# Altium PCB PCB1.PcbDoc
Units mil, origin at the board's own origin, x right, y up, seen from the top; angles counter-clockwise.
Board outline 6000 x 4000 mil, 2 copper layers (Top Layer, Bottom Layer); 30 components, 18 nets, 101 pads, 0 vias.
Unrouted connection lines stored in the file: 64.
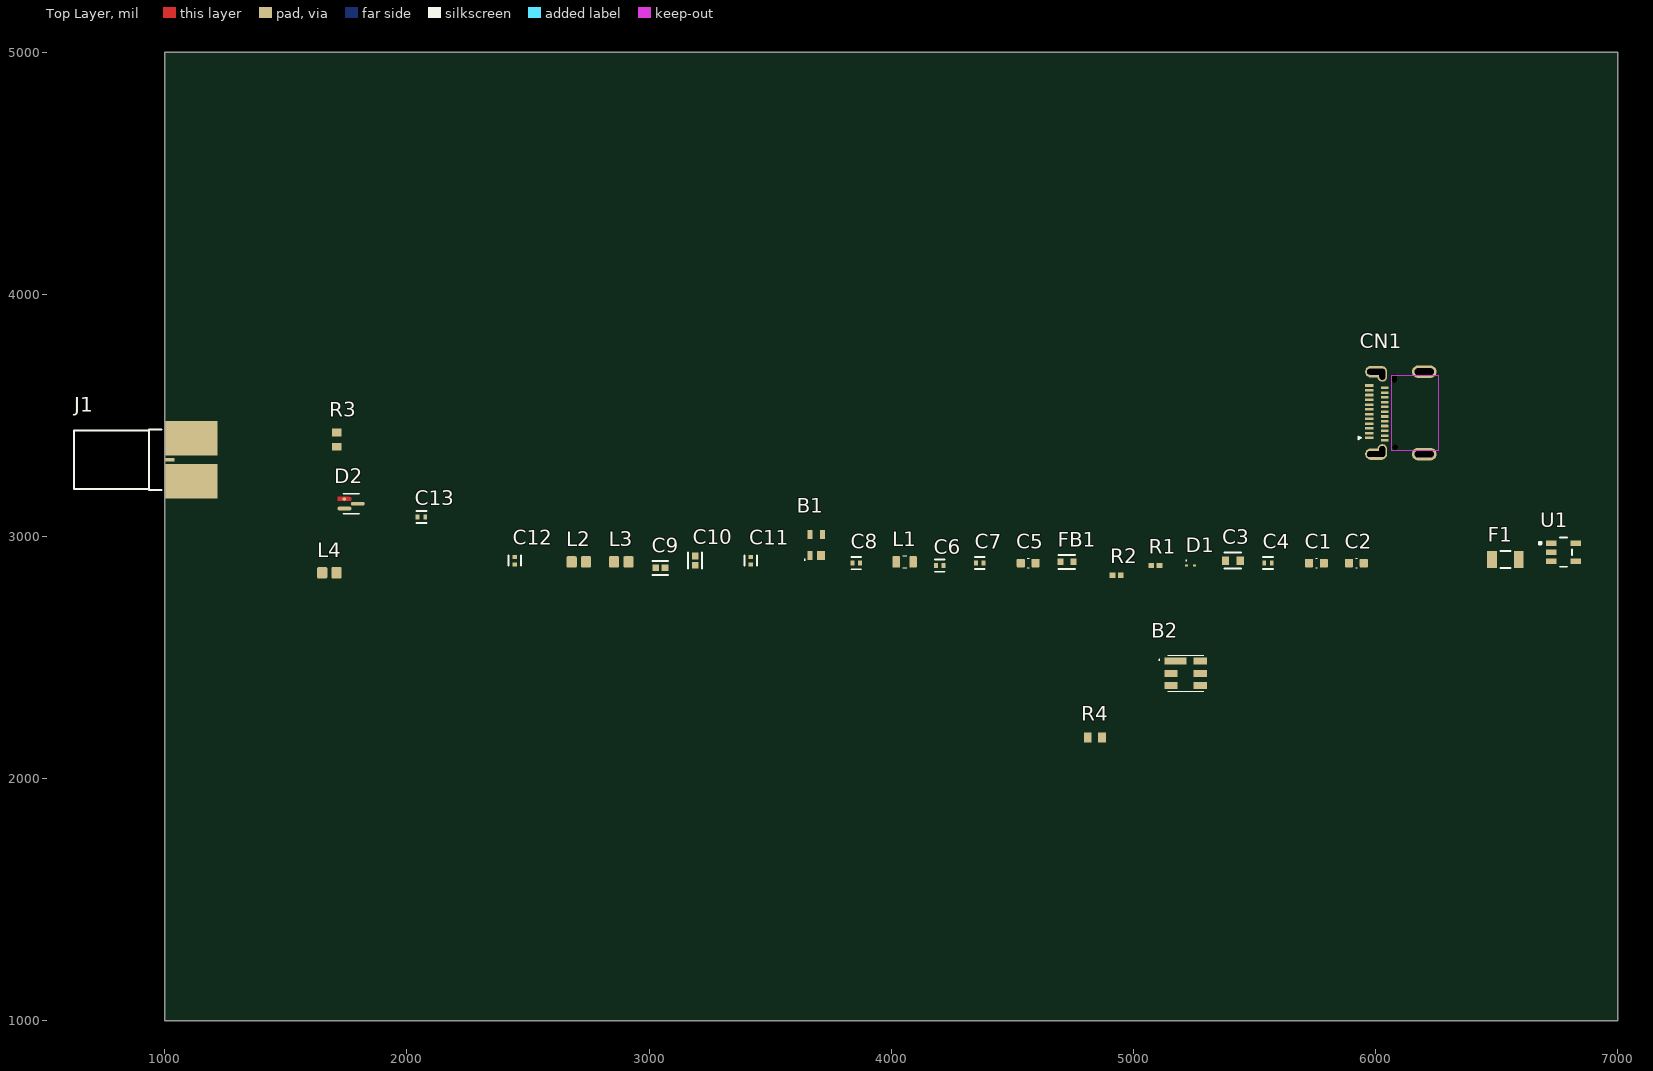
[diagram p0: Top Layer view]
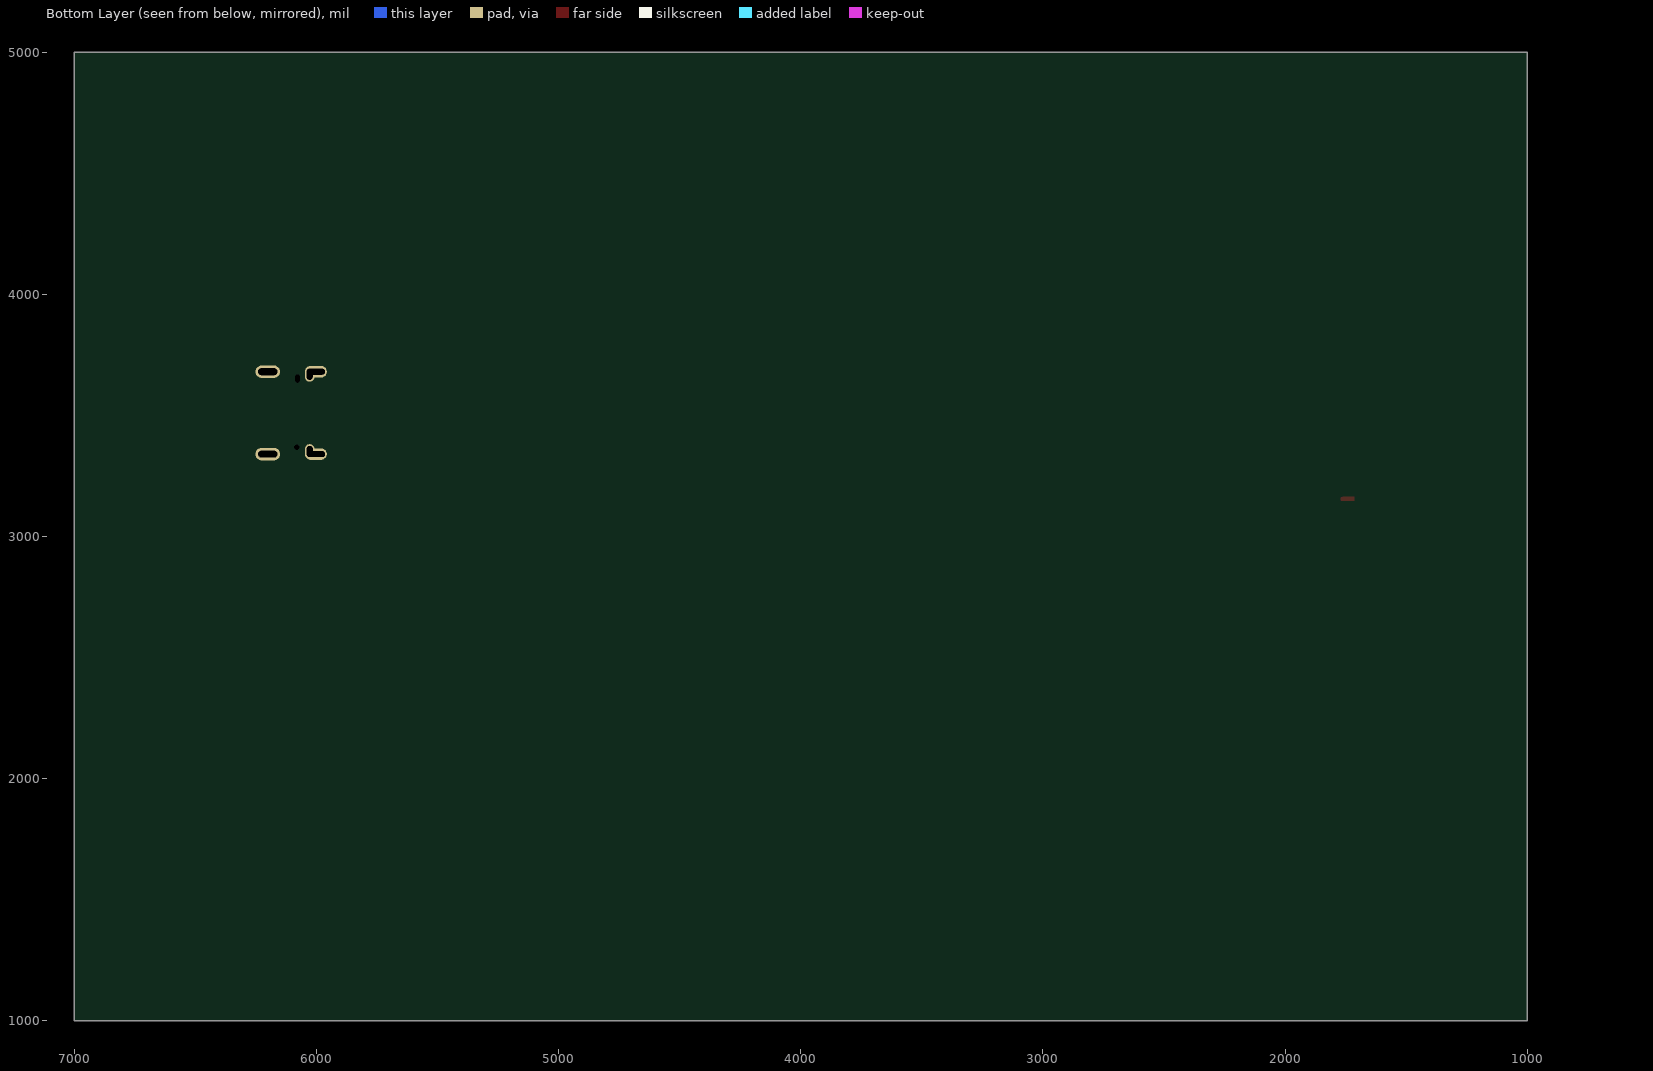
[diagram p1: Bottom Layer view, seen from below]

## Layer stack, top to bottom
Top Solder: solder mask 0.4, Solder Resist, Dk 3.5
Top Layer: signal copper 1.4
Dielectric 1: dielectric 12.6, FR-4, Dk 4.8
Bottom Layer: signal copper 1.4
Bottom Solder: solder mask 0.4, Solder Resist, Dk 3.5

## Board outline
1000,1000 7000,1000 7000,5000 1000,5000

## Design rules (kind name [scope] priority, off if disabled: settings)
Clearance [All] p1: gap=10 ignorepadtopadclearanceinfootprint=FALSE
PolygonConnect [All] p1: connectstyle=Relief reliefconductorwidth=10 reliefentries=4 polygonreliefangle="90 Angle" airgapwidth=10
RoutingVias [All] p1: holewidth=28 width=50 viastyle="Through Hole" minholewidth=28 minwidth=50 maxholewidth=28 maxwidth=50
SolderMaskExpansion [All] p1: expansion=0 istentingtop=FALSE
SupplyNets "Schematic Supply Nets_2" [InNet('+5')] p1: voltage=0.000
SupplyNets "Schematic Supply Nets_1" [InNet('+3.3V')] p2: voltage=0.000
SupplyNets "Schematic Supply Nets" [InNet('GND')] p3: voltage=0.000
Width [All] p1: maxlimit=10 minlimit=10 preferedwidth=10
30 further rules are at their usual default settings.

## Classes and differential pairs
component class 01_POWER: C1 C2 C3 C4 CN1 D1 F1 R1 R2 U1
component class 02_RF_FRONT_END: B1 B2 C5 C6 C7 C8 C9 C10 C11 C12 C13 D2 FB1 J1 L1 L2 L3 L4 R3 R4

## Components (designator, comment, footprint, x,y, rotation, side; value= is the part's Value field where it differs from the comment)
B1 "PSA4-5043+" PSA45043 3690,2965 r0 top
B2 "SF2321D" SF2321D 5215,2435 r0 top
C1 "GRM188R61A105KA61D" RESC1608X100N 5755,2890 r0 top value=1µF
C2 "GRM188R61A105KA61D" RESC1608X100N 5920,2890 r0 top value=1µF
C3 "GRM188R61A106KE69D" FP-GRM18-0_15-MFG 5410,2900 r0 top value=10µF
C4 "GRM155R71C104KA88D" FP-GRM15-MFG 5555,2890 r0 top value=100nF
C5 "GRM188R61A105KA61D" RESC1608X100N 4565,2890 r0 top value=1µF
C6 "GCM1555C1H101JA16J" FP-GCM155-0_05-MFG 4200,2880 r0 top value=100pF
C7 "GRM155R71C104KA88D" FP-GRM15-MFG 4365,2890 r0 top value=100nF
C8 "GRM1555C1H102JA01D" FP-GRM155-0_05-MFG 3855,2890 r0 top value=1nF
C9 "GJM1555C1H3R0CB01D" FP-GJM155-0_05-IPC_A 3046.16,2870 r0 top value=3pF
C10 "GJM1555C1H3R0CB01D" FP-GJM155-0_05-IPC_A 3190,2900 r90 top value=3pF
C11 "GCM1555C1H101JA16J" FP-GCM155-0_05-MFG 3420,2900 r90 top value=100pF
C12 "GCM1555C1H101JA16J" FP-GCM155-0_05-MFG 2445,2900 r90 top value=100pF
C13 "GJM1555C1H4R7CB01D" FP-GJM155-0_05-MFG 2060,3080 r0 top value=4.7pF
CN1 "DX07S024JJ3R1300" JAE-DX07S024JJ3_V 6080,3510 r90 top
D1 "ESD9B5.0ST5G" ONSC-SOD-923-2-514AB-01_V 5235,2880 r0 top
D2 "RCLAMP0502BATCT" FP-SC75-IPC_A 1770,3135 r0 top
F1 "1206L050YR" FP-1206L050YR-MFG 6535,2905 r0 top
FB1 "BLM18AG102SN1D" FP-BLM18-0_15-t0_8-MFG 4725,2895 r0 top
J1 "60312202111561" 60312202111561 1110,3316.02 r270 top
L1 "Coilcraft 0603CS-68NX" INDC1811X102N#1 4055,2895 r0 top value=68nH
L2 "0603CS5N6XJRW" INDC1811X100N 2710,2895 r0 top value=5.6nH
L3 "0603CS5N6XJRW" INDC1811X102N#2 2885,2895 r0 top value=5.6nH
L4 "0603CS-3N9XJRW" INDC1811X100N 1680,2850 r0 top value=3.9nH
R1 "RC0402FR-075K1L" RESC1005X40X25NL05T10 5090,2880 r0 top value=5.1k
R2 "RC0402FR-075K1L" RESC1005X40X25NL05T10 4930,2840 r0 top value=5.1k
R3 "Resistor 0R +/- 5% 0603 100 mW" RESC1608X55X25ML10T15 1710,3399.53 r90 top value=0
R4 "Resistor 0R +/- 5% 0603 100 mW" RESC1608X55X25ML10T15 4840.47,2170 r0 top value=0
U1 "TPS7A2033PDBVR" FP-DBV0005A-MFG 6775,2935 r0 top

## Footprints (in the part's own frame and the unit in brackets; to place one, negate y for a bottom-side part, rotate by r counter-clockwise, add the part's x,y. Pads: shape width x height; smd on the part's side, far side on the other; paste and mask are expansions set on the pad)
60312202111561 [mm] "SMA Edgecard Mount Jack"
  rect 0.35x1 smd: 1(0,-2.27)
  rect 3.61x5.54 smd: 2(-2.26,0) 3(2.26,0)
  silkscreen extent -3.17,-12.3 3.18,-3.1, body extent -3.18,-12.3 3.18,1.78, height 3.29
FP-1206L050YR-MFG [mm]
  rect 1x1.8 smd paste+0 mask+0: 1(-1.4,0) 2(1.4,0)
  silkscreen extent -0.53,-0.9 0.53,0.9, body extent -2,-1 2,1, height 0.25
FP-BLM18-0_15-t0_8-MFG [mm]
  rect 0.65x0.7 smd paste+0 mask+0: 1(-0.675,0) 2(0.675,0)
  silkscreen extent -0.87,-0.72 0.87,0.72, body extent -1.1,-0.58 1.1,0.58, height 0.25
FP-DBV0005A-MFG [mm]
  rrect17% 1.1x0.6 smd paste+0 mask+0: 1(-1.3,0.95) 2(-1.3,0) 3(-1.3,-0.95) 4(1.3,-0.95) 5(1.3,0.95)
  silkscreen extent -2.57,-1.53 0.87,1.53, body extent -1.95,-1.78 1.95,1.78, height 0.25
FP-GCM155-0_05-MFG [mm]
  rect 0.4x0.5 smd paste+0 mask+0: 1(-0.4,0) 2(0.4,0)
  silkscreen extent -0.53,-0.65 0.53,0.65, body extent -0.7,-0.38 0.7,0.38, height 0.25
FP-GJM155-0_05-IPC_A [mil]
  rect 28.16x26.48 smd paste+0 mask+0: 1(-18.84,0) 2(18.84,0)
  silkscreen extent -33,-29 33,29, body extent -41,-21 41,21, height 10
FP-GJM155-0_05-MFG [mm]
  rect 0.4x0.5 smd paste+0 mask+0: 1(-0.4,0) 2(0.4,0)
  silkscreen extent -0.53,-0.63 0.53,0.63, body extent -0.7,-0.38 0.7,0.38, height 0.25
FP-GRM15-MFG [mm]
  rect 0.4x0.5 smd paste+0 mask+0: 1(-0.4,0) 2(0.4,0)
  silkscreen extent -0.53,-0.63 0.53,0.63, body extent -0.7,-0.38 0.7,0.38, height 0.25
FP-GRM18-0_15-MFG [mm]
  rect 0.75x0.9 smd paste+0 mask+0: 1(-0.775,0) 2(0.775,0)
  silkscreen extent -0.88,-0.83 0.87,0.85, body extent -1.25,-0.58 1.25,0.58, height 0.25
FP-GRM155-0_05-MFG [mm]
  rect 0.4x0.5 smd paste+0 mask+0: 1(-0.4,0) 2(0.4,0)
  silkscreen extent -0.5,-0.65 0.5,0.65, body extent -0.7,-0.38 0.7,0.38, height 0.25
FP-SC75-IPC_A [mm]
  round 0.374 smd paste+0 mask+0: 1(-0.722,0.5)
  rrect100% 1.457x0.416 smd paste+0 mask+0: 2(-0.701,-0.5) 3(0.701,0)
  Top Layer region: -1.429,0.708 -0.18,0.708 -0.1,0.692 -0.033,0.647 0.012,0.58 0.028,0.5 0.028,0.5 0.012,0.42 -0.033,0.353 -0.1,0.308 -0.18,0.292 -0.18,0.292 -1.429,0.292
  silkscreen extent -0.8,-1.05 0.8,1.05, body extent -1.93,-1.3 1.93,1.3, height 0.25
INDC1811X100N [mm] "Chip Inductor, 2-Leads, Body 1.75x1.06mm, IPC Medium Density"
  rrect25% 1.065x1.19 smd: 1(-0.753,0) 2(0.753,0)
  body extent -0.87,-0.53 0.87,0.53, height 1
INDC1811X102N#1 [mm] "Chip Inductor, 2-Leads, Body 1.75x1.06mm, IPC Medium Density"
  rrect25% 0.8x1.19 smd: 1(-0.885,0) 2(0.885,0)
  silkscreen extent -0.22,-0.62 0.22,0.62, body extent -0.87,-0.53 0.87,0.53, height 1.02
INDC1811X102N#2 [mm] "Chip Inductor, 2-Leads, Body 1.75x1.06mm, IPC Medium Density"
  rrect25% 1.065x1.19 smd: 1(-0.753,0) 2(0.753,0)
  body extent -0.87,-0.53 0.87,0.53, height 1.02
JAE-DX07S024JJ3_V [mm] "THD, 24-Leads, Body 8.17x8.94mm, Pitch 0.5mm"
  oval 1.2x2.3 hole 0.6 slot 1.9 at 90 deg: 1(-4.32,2) 2(4.32,2)
  oval 1.5x1 hole 0.6 slot 1.1 at 0 deg: 1(-4.02,1.35) 2(4.02,1.35)
  oval 1.3x2.6 hole 0.7 slot 2 at 90 deg: 3(-4.32,-3.05) 4(4.32,-3.05)
  rrect25% 0.27x0.9 smd: A1(-2.625,2.7) A2(-2.125,2.7) A3(-1.625,2.7) A4(-1.125,2.7) A5(-0.625,2.7) A6(-0.125,2.7) A7(0.375,2.7) A8(0.875,2.7) A9(1.375,2.7) A10(1.875,2.7) A11(2.375,2.7) A12(2.875,2.7)
  rrect25% 0.27x0.8 smd: B1(2.625,1.1) B2(2.125,1.1) B3(1.625,1.1) B4(1.125,1.1) B5(0.625,1.1) B6(0.125,1.1) B7(-0.375,1.1) B8(-0.875,1.1) B9(-1.375,1.1) B10(-1.875,1.1) B11(-2.375,1.1) B12(-2.875,1.1)
  round 0 hole 0.6 unplated: H1(-3.6,0)
  round 0 hole 0.5 slot 0.85 at 0 deg unplated: H2(3.6,0.065)
  Top Layer keep-out region: -3.9,-4.55 3.9,-4.55 3.9,0.4 -3.9,0.4
  silkscreen extent -2.83,3.49 -2.43,3.89, body extent -4.47,-5.35 4.47,2.8, height 3.16
ONSC-SOD-923-2-514AB-01_V [mm] "SOD, 2-Leads, Body 0.8x0.6mm"
  rect 0.36x0.25 smd: 1(-0.42,0) 2(0.42,0)
  silkscreen extent -0.47,0.48 -0.37,0.57, body extent -0.4,-0.3 0.4,0.3, height 0.4
PSA45043 [mm]
  rect 0.5x0.95 smd: 1(-0.65,-1.1) 3(0.65,1.1) 4(-0.65,1.1)
  rect 0.8x0.95 smd: 2(0.5,-1.1)
  silkscreen extent -1.25,-1.6 -1.15,-1.5, body extent -1,-1.02 1,1.02, height 0.9
RESC1005X40X25NL05T10 [mm] "Chip Resistor, 2-Leads, Body 1.00x0.50mm, IPC Medium Density"
  rect 0.6x0.55 smd: 1(-0.425,0) 2(0.425,0)
  body extent -0.53,-0.27 0.53,0.28, height 0.4
RESC1608X55X25ML10T15 [mm] "Chip Resistor, 2-Leads, Body 1.70x0.90mm, IPC Low Density"
  rect 0.8x1 smd: 1(-0.75,0) 2(0.75,0)
  body extent -0.85,-0.45 0.85,0.45, height 0.55
RESC1608X100N [mm] "Chip Resistor, 2-Leads, Body 1.63x0.83mm, IPC Medium Density"
  rrect25% 0.85x0.9 smd: 1(-0.775,0) 2(0.775,0)
  silkscreen extent -0.09,-0.51 0.09,0.51, body extent -0.81,-0.41 0.81,0.41, height 1
SF2321D [mm]
  rect 2.31x0.74 smd: 1(-1.085,1.27)
  rect 1.4x0.74 smd: 2(-1.54,0) 3(-1.54,-1.27) 4(1.54,-1.27) 5(1.54,0) 6(1.54,1.27)
  silkscreen extent -2.8,-1.9 1.9,1.9, body extent -2.17,-1.9 2.17,1.9, height 1.8

## Part data
B1: library part CMP-001-00093-3, "0.75DB 50MHZ~4GHZ 18.4DB Cellular, GSM, Gps, Ism, Lte, Wcdma, Wimax, Wlan SOT-343 Rf Amplifiers Rohs", Max Operating Temperature=85°C, Min Operating Temperature=-40°C
B2: library part CMP-007-000000-2, "Signal Conditioning 433.92MHZ", Manufacturer_Name="Murata Electronics", Mouser Part Number=81-SF2321D, Datasheet Link=https://www.mouser.cn/datasheet/2/281/sf2321d-1309024.pdf, Design Item ID=SF2321D, Geometry.Height=1.7mm, Manufacturer_Part_Number=SF2321D, Mouser Price/Stock=https://www.mouser.co.uk/ProductDetail/Murata-Electronics/SF2321D?qs=rrS6PyfT74ePCD44o7YaTg%3D%3D, Source=SF2321D.SchLib
C1 C2 C5: library part CMP-001-00092-1, "0603 1 uF 10 V ±10% Tolerance X5R SMT Multilayer Ceramic Capacitor", Case/Package=0603, Max Operating Temperature=85°C, Min Operating Temperature=-55°C, Tolerance=10%, Voltage Rating=10V, Mounting Technology="Surface Mount", Pins=2
C3: library part CMP-001-00094-1, "Multilayer Ceramic Capacitor, 10 uF, 10 V, ± 10%, X5R, 0603 [1608 Metric]", Case/Package=0603, Max Operating Temperature=85°C, Min Operating Temperature=-55°C, Tolerance=10%, Voltage Rating=10V, Mounting Technology="Surface Mount"
C4 C7: library part CMP-001-00091-1, "16V 100nF X7R ±10% 0402 Multilayer Ceramic Capacitors MLCC - SMD/SMT ROHS", Case/Package=0402, Max Operating Temperature=125°C, Min Operating Temperature=-55°C, Tolerance=10%, Voltage Rating=16V, Mounting Technology="Surface Mount", Pins=2
C6 C11 C12: library part CMP-001-00097-1, "50V 100pF C0G ±5% 0402 Multilayer Ceramic Capacitors MLCC - SMD/SMT ROHS", Case/Package=0402, Max Operating Temperature=125°C, Min Operating Temperature=-55°C, Tolerance=5%, Voltage Rating=50V, Mounting Technology="Surface Mount"
C8: library part CMP-001-00090-1, "50V 1nF C0G ±5% 0402 Multilayer Ceramic Capacitors MLCC - SMD/SMT ROHS", Case/Package=0402, Max Operating Temperature=125°C, Min Operating Temperature=-55°C, Tolerance=5%, Voltage Rating=50V, Mounting Technology="Surface Mount", Pins=2
C9 C10: library part CMP-001-00095-1, "0402 3 pF 50V ±0.25 pF Tolerance C0G SMT Multilayer Ceramic Capacitor", Case/Package=0402, Max Operating Temperature=125°C, Min Operating Temperature=-55°C, Voltage Rating=50V, Mounting Technology="Surface Mount"
C13: library part CMP-001-00096-1, "0402 4.7pF 50V ±0.25 pF Tolerance C0G SMT Multilayer Ceramic Capacitor", Case/Package=0402, Max Operating Temperature=125°C, Min Operating Temperature=-55°C, Voltage Rating=50V, Mounting Technology="Surface Mount", Pins=2
CN1: library part CMP-002-00065-3, "USB-C Connector, 20 V, 1.25 A, -30 to 80 degC, RoHS, Tape and Reel", Connector Type=USB-C, Gender=Receptacle, Pins=28
D1: library part CMP-004-00036-1, "Tvs Diodes & Esd Suppressors; ESD9B5.0ST5G; on Semiconductor; 5 V; 2; 15 V; 5.8 V", Case/Package=SOD-923-2, Max Operating Temperature=150°C, Max Surge Current=1A, Min Operating Temperature=-55°C, Pins=2
D2: library part CMP-004-00033-1, "ESD Suppressor Diode TVS Uni-Dir/Bi-Dir 5V 3-Pin SOT-523 T/R / TVS DIODE 5VWM 25VC SC75", Max Operating Temperature=125°C, Min Operating Temperature=-55°C, Pins=3
F1: library part CMP-005-00013-1, "PTC Resettable Fuse 0.5A(hold) 1A(trip) 6VDC 100A 0.6W 0.1s 0.15Ohm SMD Solder Pad 1206 T/R", Case/Package=1206, Current Rating=100A, Max Operating Temperature=85°C, Min Operating Temperature=-40°C, Mounting Technology="Surface Mount"
FB1: library part CMP-005-00014-1, "Ferrite Beads Multi-Layer 1KOhm 25% 100MHz 400mA 500mOhm DCR 0603 T/R", Case/Package=0603, Current Rating=400mA, Max Operating Temperature=125°C, Min Operating Temperature=-55°C, Mounting Technology="Surface Mount", Pins=2
J1: library part CMP-00025-00003-1, "Rf Conn, Sma, Jack, 50 Ohm, End Launch Rohs Compliant: Yes", Max Operating Temperature=165°C, Min Operating Temperature=-65°C
L1: library part CMP-006-00025-1, "RF inductor, ceramic core, 2% tol, SMT, RoHS, halogen-free"
L2: library part CMP-006-00023-1, "General Purpose Inductor, 0.0056uH, 5%, 1 Element, Ceramic-Core, SMD, 0603", Case/Package=0603, Max Current Rating=700mA, Max Operating Temperature=125°C, Min Operating Temperature=-40°C, Self Resonant Frequency=4.76GHz, Tolerance=5%
L3: library part CMP-006-00024-1, "General Purpose Inductor, 0.0056uH, 5%, 1 Element, Ceramic-Core, SMD, 0603", Case/Package=0603, Max Current Rating=700mA, Max Operating Temperature=125°C, Min Operating Temperature=-40°C, Self Resonant Frequency=4.76GHz, Tolerance=5%
L4: library part CMP-006-00022-1, "General Purpose Inductor, 0.0039uH, 5%, 1 Element, Ceramic-Core, SMD, 0603", Case/Package=0603, Max Current Rating=700mA, Max Operating Temperature=125°C, Min Operating Temperature=-40°C, Self Resonant Frequency=6.9GHz, Tolerance=5%
R1 R2: library part CMP-009-00177-1, "62.5mW Thick Film Resistors 50V ±100ppm/℃ ±1% 5.1kΩ 0402 Chip Resistor - Surface Mount ROHS", Case/Package=0402, Max Operating Temperature=155°C, Min Operating Temperature=-55°C, Tolerance=1%, Voltage Rating=50V, Mounting Technology="Surface Mount", Pins=2
R3 R4: library part CMP-009-00006-5, "Chip Resistor, 0 Ohm, 0.1 W, -55 to 155 degC, 0603 (1608 Metric)", Case/Package=0603, Max Operating Temperature=155°C, Min Operating Temperature=-55°C, Power=100mW, Tolerance=5%, Voltage Rating=50V, Mounting Technology=SM, Pins=2, RoHS Compliant=True
U1: library part CMP-019-00050-1, "300mA ultra-low-noise low-IQ low-dropout (LDO) linear regulator with high PSRR 5-SOT-23 -40 to 125", Case/Package=SOT-23, Dropout Voltage=145mV, Max Operating Temperature=125°C, Max Supply Voltage=6V, Min Operating Temperature=-40°C, Min Supply Voltage=1.6V, Nominal Supply Current=6.5µA, Output Current=300mA, Output Voltage=3.3V, Pins=5

## Nets (pads, with @x,y where several pads share a name; then routed paths per layer and width w, separated by ;. In a path a pad name is that pad's centre, name@x,y a point inside that pad or via, vN(x,y) a via of type N, cw(c..) or ccw(c..) an arc to the next point about the centre after c; other vN are vias at no path point)
+3.3V: C2.2 U1.5
+5: C1.2 C3.1 C4.1 D1.2 F1.2 FB1.2 U1.1
+5V_USB: U1.3
GND: B1.2 B1.4 B2.1 B2.3 B2.4 B2.6 C1.1 C2.1 C3.2 C4.2 C5.1 C6.1 C7.2 C8.2 C13.2 CN1.1 CN1.2 CN1.3 CN1.4 CN1.A1 CN1.A12 CN1.B1 CN1.B12 D1.1 D2.1 D2.2 J1.2 J1.3 L4.2 R1.1 R2.2 U1.2 U1.4
NetB1_1: B1.1 C11.2
NetB1_3: B1.3 C12.1 L1.2
NetC5_2: C5.2 C6.2 C7.1 C8.1 FB1.1 L1.1
NetC9_1: C9.1 J1.1 R3.2
NetC9_2: C9.2 C10.1 L4.1
NetC10_2: C10.2 L2.1
NetC11_1: C11.1 L3.2
NetC12_2: C12.2 R4.2
NetC13_1: C13.1 L2.2 L3.1
NetCN1_A5: CN1.A5 R1.2
NetCN1_B5: CN1.B5 R2.1
NetD2_3: D2.3 R3.1
SAW2_IN: B2.2 R4.1
VBUS_RAW: CN1.A4 CN1.A9 CN1.B4 CN1.B9 F1.1
pads on no net: B2.5 CN1.A2 CN1.A3 CN1.A6 CN1.A7 CN1.A8 CN1.A10 CN1.A11 CN1.B2 CN1.B3 CN1.B6 CN1.B7 CN1.B8 CN1.B10 CN1.B11 CN1.H1 CN1.H2

## Text inside footprints (layer, text, board x,y; h text height)
CN1: Top 3D Body "Board Edge" at 6288.66,3466.69 h19.68 r90
J1: Assembly Notes "PCB End" at 910.39,3432.23 h39.37 r270